# Altium PCB A PCB.PcbDoc
Units mm, origin at the board's own origin, x right, y up, seen from the top; angles counter-clockwise.
Board outline 26 x 22.43 mm, 2 copper layers (Top Layer, Bottom Layer); 17 components, 10 nets, 32 pads, 19 vias.
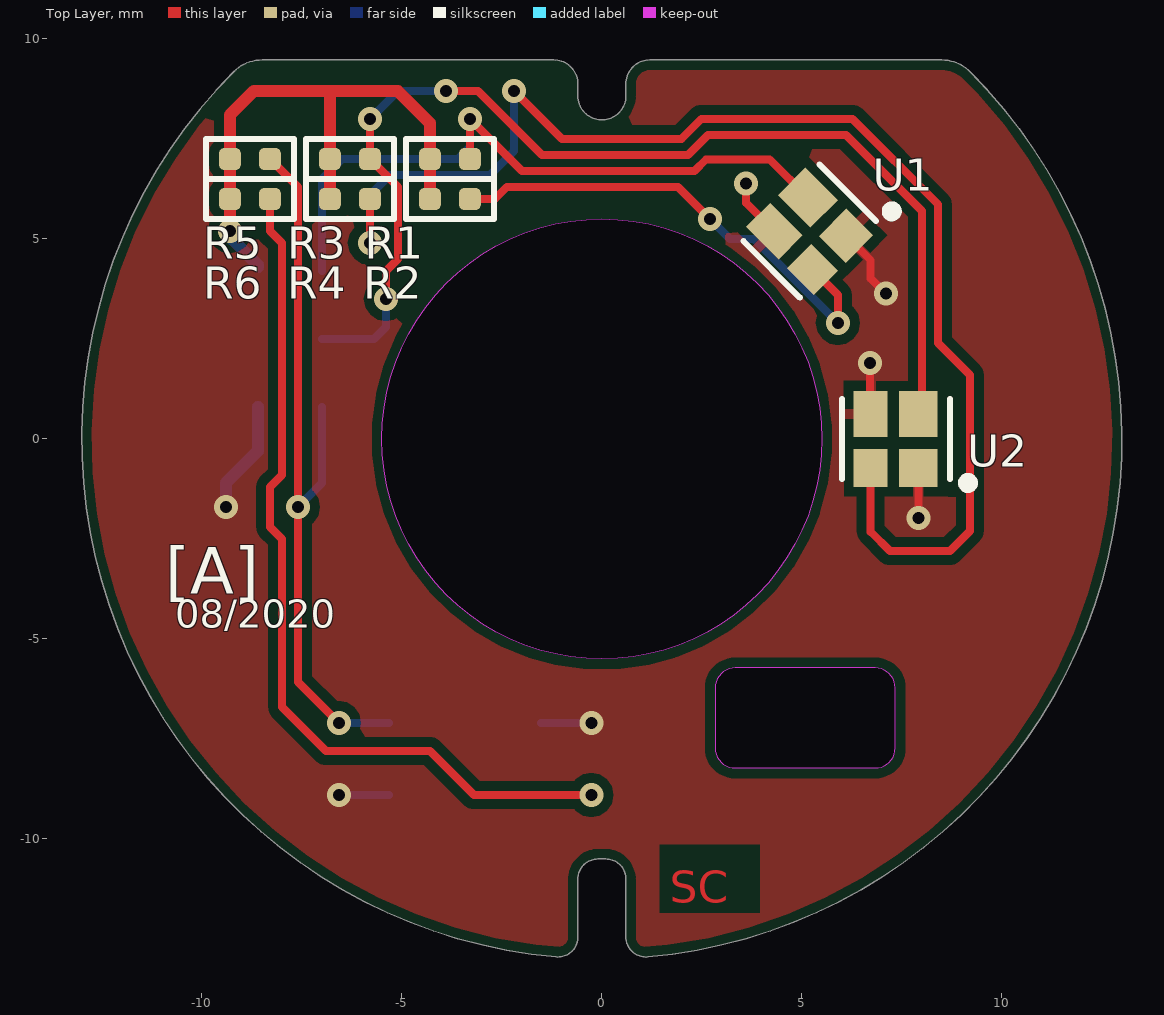
[diagram p0: Top Layer view]
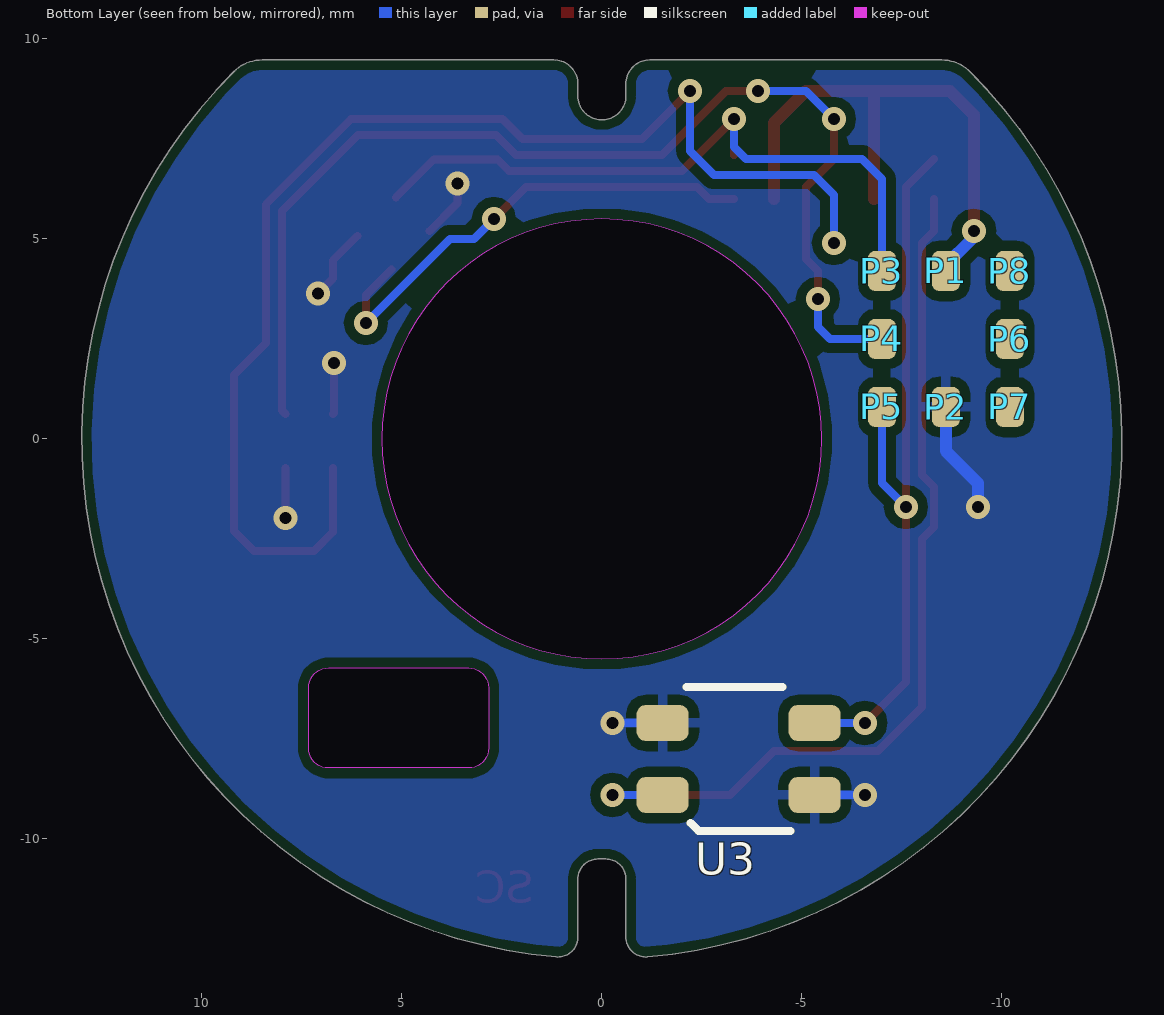
[diagram p1: Bottom Layer view, seen from below]
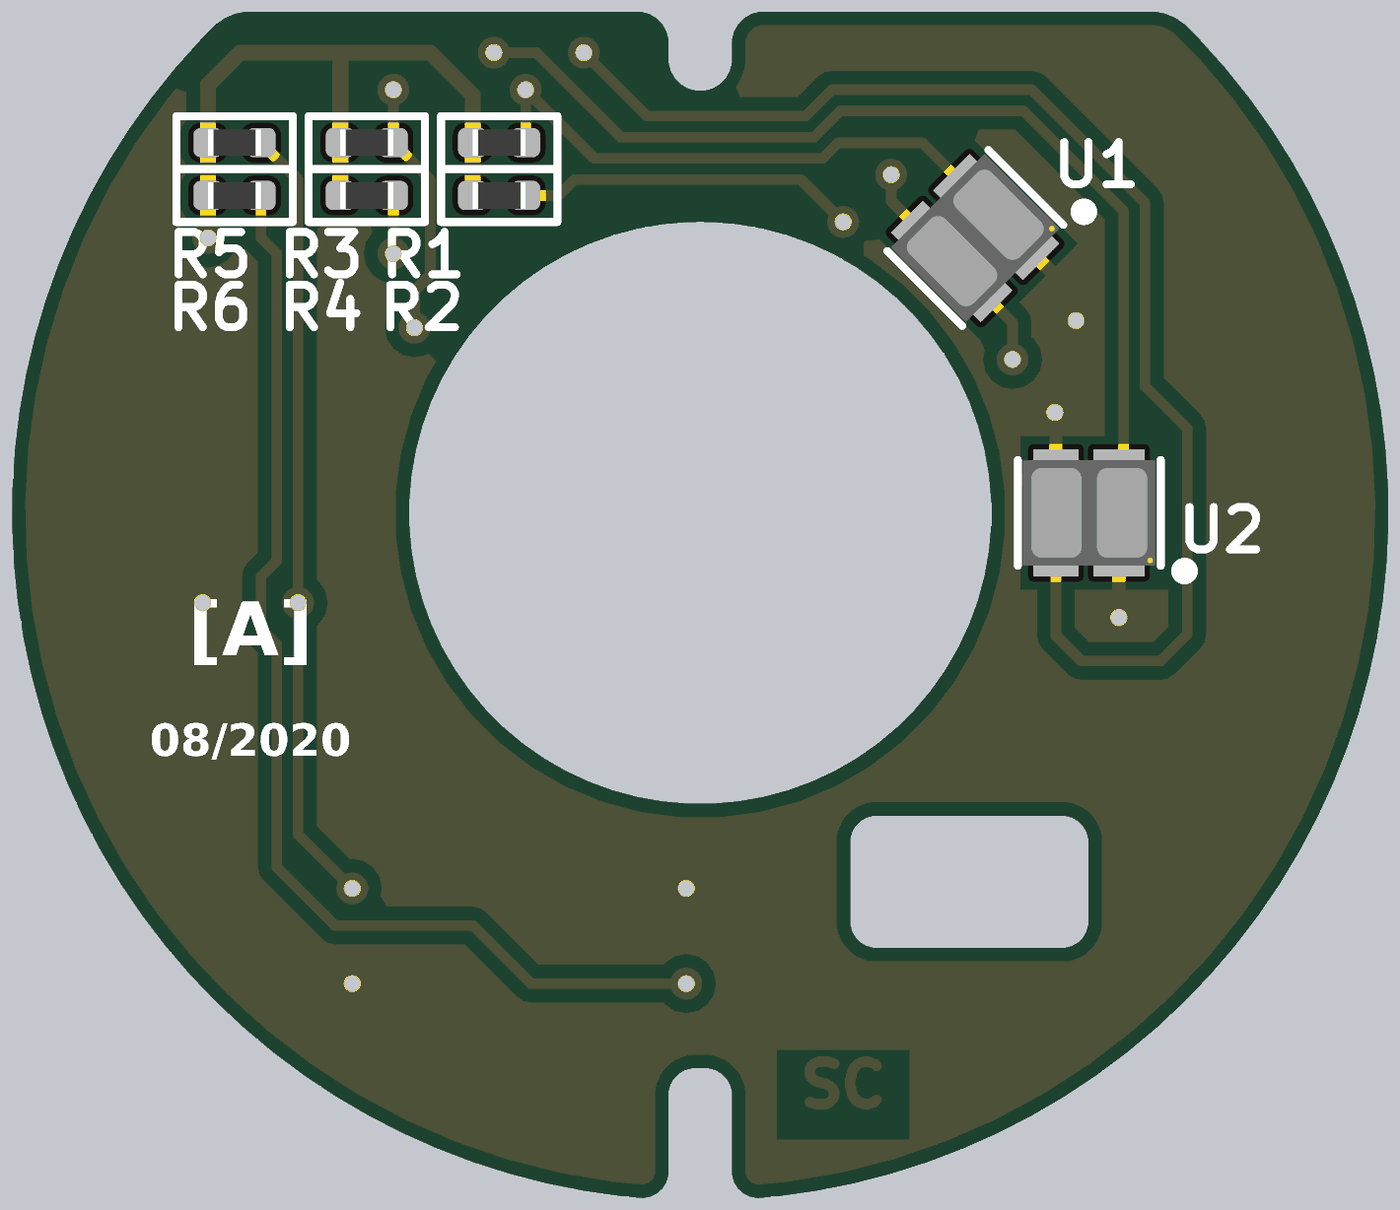
[diagram p2: 3D render of the assembled board from above, using the file's embedded part models]

## Layer stack, top to bottom
Top Solder: solder mask 0.0102, Solder Resist, Dk 3.5
Top Layer: signal copper 0.0356
Dielectric 1: dielectric 0.32, FR-4, Dk 4.8
Bottom Layer: signal copper 0.0356
Bottom Solder: solder mask 0.0102, Solder Resist, Dk 3.5

## Board outline
-1.144,-12.949 ccw(c-1.1,-12.451) -0.6,-12.451 -0.6,-11 cw(c-0.1,-11) -0.1,-10.5 0.1,-10.5 cw(c0.1,-11) 0.6,-11 0.6,-12.451 ccw(c1.1,-12.451) 1.144,-12.949 ccw(c0,0) 9.202,9.183 ccw(c8.494,8.476) 8.494,9.476 1.2,9.476 ccw(c1.2,8.876) 0.6,8.876 0.6,8.576 cw(c0,8.576) -0.6,8.576 -0.6,8.876 ccw(c-1.2,8.876) -1.2,9.476 -8.495,9.476 ccw(c-8.495,8.476) -9.203,9.183 ccw(c0,0)
cut-out: 2.833,-7.725 ccw(c3.333,-7.725) 3.333,-8.225 6.833,-8.225 ccw(c6.833,-7.725) 7.333,-7.725 7.333,-6.225 ccw(c6.833,-6.225) 6.833,-5.725 3.333,-5.725 ccw(c3.333,-6.225) 2.833,-6.225
cut-out: 0,-5.5 cw(c0,0) -5.5,0 cw(c0,0) 0,5.5 cw(c0,0) 5.5,0 cw(c0,0)

## Design rules (kind name [scope] priority, off if disabled: settings)
BoardOutlineClearance [All] p1: gap=0.25 ignorepadtopadclearanceinfootprint=FALSE
Clearance [All] p1: gap=0.25 ignorepadtopadclearanceinfootprint=FALSE except(0.2: Arc-Arc Arc-Track Arc-SMDPad Arc-THPad Arc-Via Arc-Text Arc-Hole Track-Track Track-SMDPad Track-THPad Track-Via Track-Text Track-Hole SMDPad-SMDPad SMDPad-THPad SMDPad-Via SMDPad-Text SMDPad-Hole THPad-THPad THPad-Via THPad-Text THPad-Hole Via-Via Via-Text Via-Hole Text-Text Text-Hole)
DiffPairsRouting [All] p1: maxlimit=0.5 minlimit=0.15 mostfreqgap=0.2 toplayer_minwidth=0.15 toplayer_maxwidth=1 toplayer_prefwidth=0.2 bottomlayer_minwidth=0.15 bottomlayer_maxwidth=1 bottomlayer_prefwidth=0.2 maxuncoupledlength=12.7
HoleSize [All] p1: absolutevalues=TRUE maxlimit=6 minlimit=0.025 maxpercent=80.000 minpercent=20.000
MinimumSolderMaskSliver [All] p1: minsoldermaskwidth=0
PlaneClearance [All] p1: clearance=0.5
PlaneConnect [All] p1: planeconnectstyle=Relief reliefexpansion=0.5 reliefentries=4 reliefconductorwidth=0.25 reliefairgap=0.25
PolygonConnect [All] p1: connectstyle=Relief reliefconductorwidth=0.25 reliefentries=4 polygonreliefangle="90 Angle" airgapwidth=0.25
RoutingVias [All] p1: holewidth=0.3 width=0.6 viastyle="Through Hole" minholewidth=0.3 minwidth=0.5 maxholewidth=0.6 maxwidth=7
SilkToSilkClearance [All] p1: silktosilkclearance=0
SilkToSolderMaskClearance [IsPad] p1: minsilkscreentomaskgap=0 clearancetoexposedcopper=TRUE
SolderMaskExpansion [All] p1: expansion=0.102 istentingtop=FALSE
Width [All] p1: maxlimit=20 minlimit=0.15 preferedwidth=0.2
23 further rules are at their usual default settings.

## Components (designator, comment, footprint, x,y, rotation, side; value= is the part's Value field where it differs from the comment)
P1 "PAD_4" PAD_0.5X1MM -8.6,4.2 r90 bottom
P2 "PAD_4" PAD_0.5X1MM -8.6,0.8 r90 bottom
P3 "PAD_4" PAD_0.5X1MM -7,4.2 r90 bottom
P4 "PAD_4" PAD_0.5X1MM -7,2.5 r90 bottom
P5 "PAD_4" PAD_0.5X1MM -7,0.8 r90 bottom
P6 "PAD_4" PAD_0.5X1MM -10.2,2.5 r90 bottom
P7 "PAD_4" PAD_0.5X1MM -10.2,0.8 r90 bottom
P8 "PAD_4" PAD_0.5X1MM -10.2,4.2 r90 bottom
R1 "2.7K" RESC0402X04N -3.8,7 r180 top
R2 "2.7K" RESC0402X04N -3.8,6 r180 top
R3 "2.7K" RESC0402X04N -6.3,7 r180 top
R4 "2.7K" RESC0402X04N -6.3,6 r180 top
R5 "2.7K" RESC0402X04N -8.8,7 r180 top
R6 "2.7K" RESC0402X04N -8.8,6 r180 top
U1 "VCNT2020" VCNT2020 5.197,5.197 r225 top locked
U2 "VCNT2020" VCNT2020 7.35,0 r180 top locked
U3 "QRE1113GR" QRE1113GR -3.42,-8 r180 bottom locked

## Footprints (in the part's own frame and the unit in brackets; to place one, negate y for a bottom-side part, rotate by r counter-clockwise, add the part's x,y. Pads: shape width x height; smd on the part's side, far side on the other; paste and mask are expansions set on the pad)
PAD_0.5X1MM [mm]
  rrect50% 1x0.7 smd: 1(0,0)
QRE1113GR [mm]
  rrect50% 1.3x0.9 smd: 1(-1.9,-0.9) 2(1.9,-0.9) 3(1.9,0.9) 4(-1.9,0.9)
  silkscreen extent -1.3,-1.8 1.3,1.8, body extent -2.4,-1.8 2.4,1.8, height 1.71
RESC0402X04N [mm] "Chip Resistor, 2-Leads, Body 1.00x0.50mm, IPC Medium Density"
  rrect50% 0.55x0.55 smd: 1(-0.5,0) 2(0.5,0)
  silkscreen extent -1.1,-0.5 1.1,0.5, body extent -0.5,-0.25 0.5,0.25, height 0.35
VCNT2020 [mm] "4-SMD"
  rect 0.97x0.95 smd: 1(-0.56,0.725)
  rect 0.97x1.15 smd: 2(-0.56,-0.625)
  rect 0.85x0.95 smd: 3(0.63,0.725)
  rect 0.85x1.15 smd: 4(0.63,-0.625)
  silkscreen extent -1.92,-1 1.35,1.22, body extent -1.25,-1 1.25,1, height 0.81

## Part data
P1 P2 P3 P4 P5 P6 P7 P8: "a Rec pad, 0.5X1mm"
R1 R2 R3 R4 R5 R6: library part "RES 2.7K", "RES SMD 2.7K OHM 1% 1/16W 0402", Manufacturer=YAGEO, Manufacturer Part Number=AC0402FR-072K7L, Package / Case=0402, Supplier Part Number 1=C144771, Category=Resistors, Resistance=2.7K, Supplier 1=LCSC
U1 U2: "REFLECTIVE SENSOR WITH PTR OUTPU", Case="4-SMD Module", Manufacturer="Vishay Semiconductor Opto Division", Supplier Part Number 1=161-2156, Category="Optical Sensors", Manufacturer Part Number=VCNT2020, Supplier 1=RS
U3: "SENSOR OPTO TRANS REFL SMD PHOTO", Case="4-SMD Module", Manufacturer="ON Semiconductor", Category="Optical Sensors", Manufacturer Part Number=QRE1113GR

## Via types
v1: diameter 0.6, hole 0.3, Top Layer to Bottom Layer, tented both sides, 19 vias

## Nets (pads, with @x,y where several pads share a name; then routed paths per layer and width w, separated by ;. In a path a pad name is that pad's centre, name@x,y a point inside that pad or via, vN(x,y) a via of type N, cw(c..) or ccw(c..) an arc to the next point about the centre after c; other vN are vias at no path point)
3V3: P1.1 R1.2 R2.2 R3.2 R4.2 R5.2 R6.2 | length 14.3
  Top Layer w0.3: v1(-9.3,5.2) R6.2 R5.2 -9.3,8.1 -8.7,8.7 -6.8,8.7 ; R4.2 R3.2 -6.8,8.7 ; R2.2 R1.2 -4.3,7.9 -5.1,8.7 -6.8,8.7
  Bottom Layer w0.3: v1(-9.3,5.2) -9.243,5.143 -9.243,4.993 -8.6,4.35 P1.1@-8.6,4.3
B_GND: P2.1 U1.1 U1.4 U2.1 U2.4 U3.2 U3.4 | length 11.2
  Top Layer w0.2: v1(3.607,6.393) 3.607,5.896 U1.4 ; U1.1 6.72,4.466 6.72,4.015 v1(7.1,3.635) ; v1(6.7,1.9) 6.7,0.645 U2.4 ; v1(7.91,-1.98) U2.1
  Bottom Layer w0.2: v1(-6.575,-8.9) U3.2 ; U3.4 v1(-0.265,-7.1)
  Bottom Layer w0.3: v1(-9.4,-1.7) -9.4,-1.1 -8.6,-0.3 P2.1
GND: P7.1
LD1: R2.1 U1.3 | length 12.3
  Top Layer w0.2: R2.1 -2.678,6 -2.378,6.3 1.9,6.3 v1(2.7,5.5) ; U1.3 5.264,4.236 5.9,3.6 v1(5.9,2.9)
  Bottom Layer w0.2: v1(2.7,5.5) 3.2,5 3.8,5 4.5,4.3 v1(5.9,2.9)
LD2: R4.1 U2.3 | length 33
  Top Layer w0.2: v1(-5.8,4.9) R4.1 ; v1(-2.2,8.7) -1,7.5 1.984,7.5 2.484,8 6.266,8 8.4,5.866 8.4,2.4 9.2,1.6 9.2,-2.3 8.7,-2.8 7.2,-2.8 6.72,-2.32 U2.3
  Bottom Layer w0.2: v1(-5.8,4.9) -5.8,6.1 -5.3,6.6 -2.8,6.6 -2.2,7.2 v1(-2.2,8.7)
LD3: R6.1 U3.1 | length 23
  Top Layer w0.2: R6.1 -8.3,5.2 -8,4.9 -8,-0.9 -8.3,-1.2 -8.3,-2.2 -8,-2.5 -8,-6.7 -6.9,-7.8 -4.3,-7.8 -3.2,-8.9 v1(-0.265,-8.9)
  Bottom Layer w0.2: U3.1 v1(-0.265,-8.9)
S1: P3.1 R1.1 U1.2 | length 17.4
  Top Layer w0.2: R1.1@-3.3,7.1 v1(-3.3,8) -2,6.7 2.316,6.7 2.609,6.993 4.193,6.993 U1.2
  Bottom Layer w0.2: P3.1 -7,6.5 -6.5,7 -3.6,7 -3.3,7.3 v1(-3.3,8)
S2: P4.1 R3.1 U2.2 | length 28.3
  Top Layer w0.2: v1(-5.8,8) R3.1 -5.1,6.3 -5.1,4.5 -5.4,4.2 v1(-5.4,3.5) ; v1(-3.9,8.7) -3.1,8.7 -1.5,7.1 2.15,7.1 2.65,7.6 6.1,7.6 8,5.7 8,0.715 U2.2
  Bottom Layer w0.2: P4.1 -5.7,2.5 -5.4,2.8 v1(-5.4,3.5) ; v1@-5.783,8 v1(-5.8,8) -5.1,8.7 v1(-3.9,8.7) v1@-3.8,8.7
S3: P5.1 R5.1 U3.3 | length 18.8
  Top Layer w0.2: R5.1 -7.6,6.3 v1(-7.6,-1.7) -7.6,-6.075 v1(-6.575,-7.1)
  Bottom Layer w0.2: v1(-7.6,-1.7) -7,-1.1 P5.1 ; v1(-6.575,-7.1) U3.3
VIN: P6.1
pads on no net: P8.1

## Polygon pours and split planes (outlines as drawn)
B_GND on Top Layer "B_GND_L01_P000" (solid, remove dead copper, pour order 0): -13.1,-13 -13.1,9.5 13,9.5 13,-13
B_GND on Bottom Layer "B_GND_L02_P001" (solid, remove dead copper, pour order 1): -13.1,-13 -13.1,9.5 13,9.5 13,-13

## Other copper
Top Layer:
  text "SC" at 1.7,-11.6 h0.8

## Silkscreen, mask and mechanical layers (free items; w line width, h text height)
Top Overlay:
  text "[A]" at -10.92,-4.254 h2
  text "08/2020" at -10.661,-4.956 h1.2
Mechanical 1:
  circle w0.2: c0,0 r5.5
  lines w0.2: -9.203,9.183 ccw(c0,0) -1.144,-12.949 ccw(c-1.1,-12.451) -0.6,-12.451 -0.6,-11 cw(c-0.1,-11) -0.1,-10.5 0.1,-10.5 cw(c0.1,-11) 0.6,-11 0.6,-12.451 ccw(c1.1,-12.451) 1.144,-12.949 ccw(c0,0) 9.202,9.183 ccw(c8.494,8.476) 8.494,9.476 1.2,9.476 ccw(c1.2,8.876) 0.6,8.876 0.6,8.576 cw(c0,8.576) -0.6,8.576 -0.6,8.876 ccw(c-1.2,8.876) -1.2,9.476 -8.495,9.476 ccw(c-8.495,8.476) -9.203,9.183 ; 2.833,-7.725 ccw(c3.333,-7.725) 3.333,-8.225 6.833,-8.225 ccw(c6.833,-7.725) 7.333,-7.725 7.333,-6.225 ccw(c6.833,-6.225) 6.833,-5.725 3.333,-5.725 ccw(c3.333,-6.225) 2.833,-6.225 2.833,-7.725